# Altium PCB PCB3.PcbDoc
Units mm, origin at the board's own origin, x right, y up, seen from the top; angles counter-clockwise.
Board outline 42.93 x 12.19 mm, 2 copper layers (Top Layer, Bottom Layer); 11 components, 11 nets, 38 pads, 11 vias.
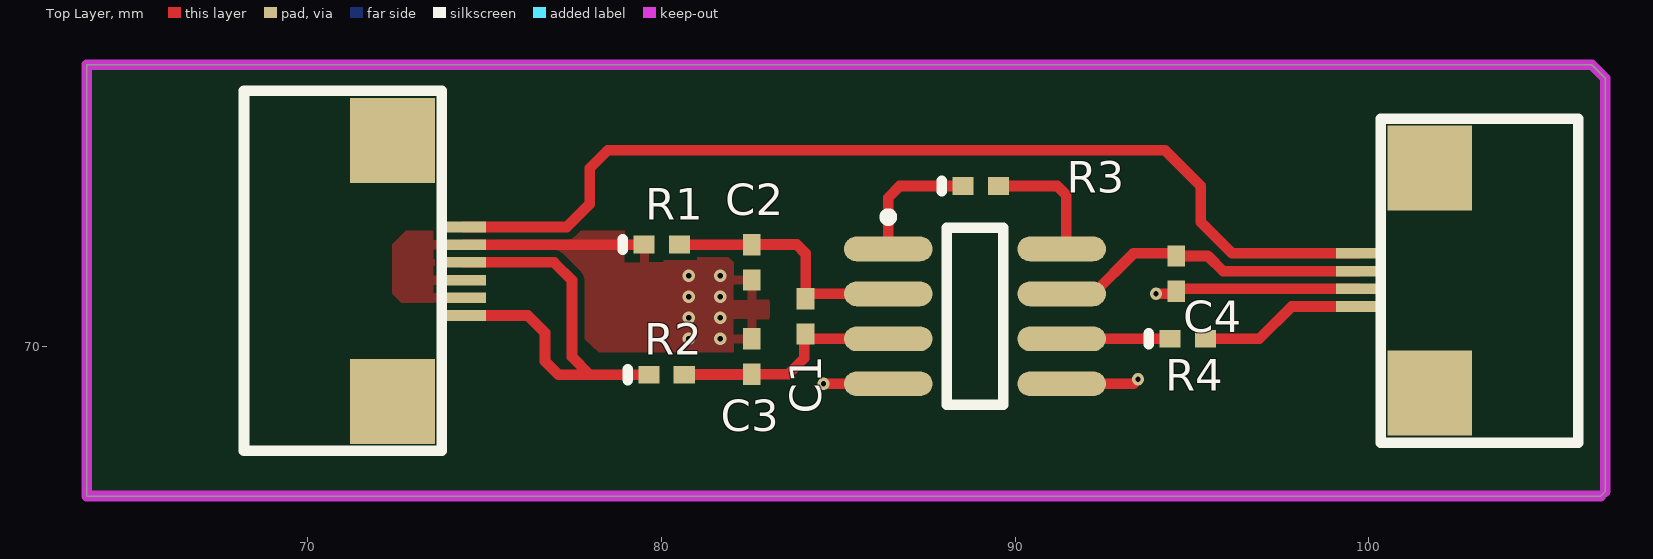
[diagram p0: Top Layer view]
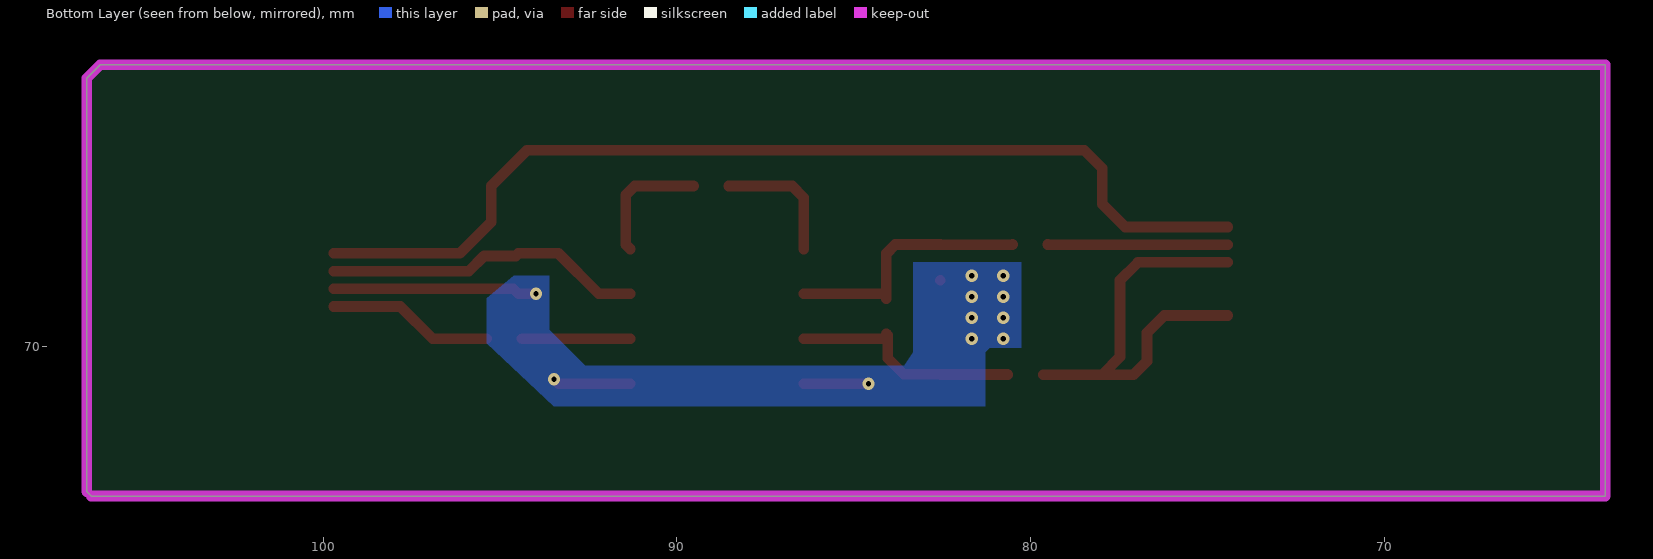
[diagram p1: Bottom Layer view, seen from below]

## Layer stack, top to bottom
Top Solder: solder mask 0.0102, Solder Resist, Dk 3.5
Top Layer: signal copper 0.0356
Dielectric 1: dielectric 0.32, FR-4, Dk 4.8
Bottom Layer: signal copper 0.0356
Bottom Solder: solder mask 0.0102, Solder Resist, Dk 3.5

## Board outline
63.754,65.786 106.553,65.786 106.68,65.913 106.68,77.597 106.299,77.978 63.754,77.978

## Design rules (kind name [scope] priority, off if disabled: settings)
Clearance Clearance_1 [InPolygon] p1: gap=0.2 ignorepadtopadclearanceinfootprint=FALSE
Clearance [All] p2: gap=0 ignorepadtopadclearanceinfootprint=FALSE
PolygonConnect [All] p1: thpad.connectstyle=Relief thpad.reliefconductorwidth=0.254 thpad.reliefentries=4 thpad.polygonreliefangle="90 Angle" thpad.airgapwidth=0.254 smdpad.connectstyle=Relief smdpad.reliefconductorwidth=0.254 smdpad.reliefentries=4 smdpad.polygonreliefangle="90 Angle" smdpad.airgapwidth=0.254 via.connectstyle=Direct via.reliefconductorwidth=0.254 via.reliefentries=4 via.polygonreliefangle="90 Angle" via.airgapwidth=0.254
RoutingVias [All] p1: holewidth=0.15 width=0.35 viastyle="Through Hole" minholewidth=0.15 minwidth=0.35 maxholewidth=0.711 maxwidth=1.27
SolderMaskExpansion [All] p1: expansion=0.102
Width [All] p1: maxlimit=0.762 minlimit=0.025 preferedwidth=0.254 minimp=50.000000 maximp=50.000000 favimp=50.000000
30 further rules are at their usual default settings.

## Classes and differential pairs
component class Sheet2: C1 C2 C3 C4 R1 R2 R3 R4

## Components (designator, comment, footprint, x,y, rotation, side; value= is the part's Value field where it differs from the comment)
C1 "1nF" 0402 84.074,70.866 r90 top
C2 "1nF" 0402 82.55,72.39 r90 top
C3 "1nF" 0402 82.55,69.731 r90 top
C4 "0.1nF" 0402 94.551,72.072 r270 top
IC1 "AD623" SO8_M 88.863,70.866 r0 top
P1 "Header 6" 软排线6p 89.154,78.117 r270 top
P2 "Header 4" 软排线4p 101.473,60.956 r90 top
R1 "1K" 0402-A 80.01,72.898 r0 top
R2 "1K" 0402-A 80.145,69.215 r0 top
R3 "10K" 0402-A 89.027,74.549 r0 top
R4 "100R" 0402-A 94.877,70.231 r0 top

## Footprints (in the part's own frame and the unit in brackets; to place one, negate y for a bottom-side part, rotate by r counter-clockwise, add the part's x,y. Pads: shape width x height; smd on the part's side, far side on the other; paste and mask are expansions set on the pad)
0402 [mm] "Chip Capacitor, Body 1.0x0.5mm, IPC High Density"
  rect 0.6x0.5 smd: 1(-0.5,0) 2(0.5,0)
  body extent -0.55,-0.3 0.55,0.3, height 1.3
0402-A [mm] "Chip Inductor, Body 1.0x0.5mm, IPC High Density"
  rect 0.6x0.5 smd: 1(-0.5,0) 2(0.5,0)
  silkscreen extent -1.1,-0.15 -1.1,0.15, body extent -0.55,-0.3 0.55,0.3, height 0.55
SO8_M [mm] "SOIC, 8-Leads, Body 4.9x3.9mm, Pitch 1.27mm, IPC Low Density"
  oval 2.5x0.7 smd: 1(-2.45,1.905) 2(-2.45,0.635) 3(-2.45,-0.635) 4(-2.45,-1.905) 5(2.45,-1.905) 6(2.45,-0.635) 7(2.45,0.635) 8(2.45,1.905)
  silkscreen extent -2.57,-2.5 0.8,2.93, body extent -2,-2.5 2,2.5, height 1.75
软排线4p [mm]
  rect 0.3x1.25 smd: 1(11.688,1.778) 2(11.188,1.778) 3(10.688,1.778) 4(10.188,1.778)
  rect 2.4x2.4 smd: ""(7.738,-0.247) ""(14.106,-0.247)
  silkscreen extent 6.34,-4.44 15.49,1.14
软排线6p [mm]
  rect 0.3x1.25 smd: 1(7.227,-14.732) 3(6.227,-14.732) 4(5.727,-14.732) 5(5.227,-14.732) 5(6.727,-14.732) 6(4.727,-14.732)
  rect 2.4x2.4 smd: ""(2.277,-16.757) ""(9.661,-16.757)
  silkscreen extent 0.88,-20.95 11.05,-15.37

## Part data
C1 C2 C3 C4: library part CAP, "电容"
IC1: "IC"
P1: "Header, 6-Pin", LatestRevisionDate=17-Jul-2002, LatestRevisionNote="Re-released for DXP Platform.", Publisher="Altium Limited"
P2: "Header, 4-Pin", LatestRevisionDate=17-Jul-2002, LatestRevisionNote="Re-released for DXP Platform.", Publisher="Altium Limited"
R1 R2 R3 R4: library part RES, "电阻"

## Via types
v1: diameter 0.35, hole 0.15, Top Layer to Bottom Layer, tented both sides, 11 vias

## Nets (pads, with @x,y where several pads share a name; then routed paths per layer and width w, separated by ;. In a path a pad name is that pad's centre, name@x,y a point inside that pad or via, vN(x,y) a via of type N, cw(c..) or ccw(c..) an arc to the next point about the centre after c; other vN are vias at no path point)
NetC1_1: C1.1 C3.1 IC1.3 R2.2 | length 6.5
  Top Layer w0.3: R2.2 80.653,69.223 82.542,69.223 C3.1 83.582,69.231 84.036,69.685 84.036,70.328 C1.1 ; C1.1@84.197,70.231 IC1.3
NetC1_2: C1.2 C2.2 IC1.2 R1.2 | length 7.2
  Top Layer w0.3: R1.2 80.514,72.894 82.546,72.894 C2.2 82.558,72.898 83.82,72.898 84.074,72.644 C1.2 ; C1.2@84.197,71.501 IC1.2
NetC2_1: C2.1 C3.2 C4.2 IC1.4 IC1.5 P1.3 P1.5 P2.3 R1.1 | length 14.9
  Top Layer w0.3: P1.5@74.422,72.89 79.502,72.89 R1.1 ; v1(84.582,68.961) IC1.4 ; IC1.5 93.345,68.961 v1(93.472,69.088) ; v1(93.98,71.501) 94.48,71.501 C4.2 94.623,71.644 P2.3
  other v1: 80.772,70.231 81.661,70.231 80.772,70.824 81.661,70.824 80.772,71.416 81.661,71.416 80.772,72.009 81.661,72.009
NetC4_1: C4.1 IC1.7 P2.2 | length 9.1
  Top Layer w0.3: IC1.7 92.202,71.501 93.345,72.644 94.48,72.644 C4.1 95.449,72.572 95.877,72.144 P2.2
NetIC1_1: IC1.1 R3.1 | length 3.7
  Top Layer w0.3: IC1.1 86.413,74.221 86.741,74.549 R3.1
NetIC1_6: IC1.6 R4.1 | length 3.1
  Top Layer w0.3: IC1.6 R4.1
NetIC1_8: IC1.8 R3.2 | length 3.6
  Top Layer w0.3: R3.2 91.186,74.549 91.44,74.295 91.44,72.898 IC1.8
NetP1_1: P1.1 P1.4 R2.1 | length 12.5
  Top Layer w0.3: P1.1 76.219,70.89 76.708,70.401 76.708,69.596 77.089,69.215 77.978,69.215 ; P1.4 76.962,72.39 76.983,72.369 77.47,71.882 77.47,69.723 77.978,69.215 ; R2.1 77.978,69.215
NetP1_6: P1.6 P2.1 | length 28.6
  Top Layer w0.3: P1.6 77.327,73.39 77.978,74.041 77.978,75.057 78.486,75.565 94.234,75.565 95.25,74.549 95.25,73.533 96.139,72.644 P2.1
NetP2_4: P2.4 R4.2 | length 4.7
  Top Layer w0.3: R4.2 96.901,70.231 97.814,71.144 P2.4
V-: 
pads on no net: P1. P2.

## Polygon pours and split planes (outlines as drawn)
NetC2_1 on Top Layer (solid, remove dead copper, pour order 0): 72.39,72.898 72.771,73.279 79.756,73.279 80.01,73.025 80.01,72.644 81.788,72.644 82.042,72.39 83.058,72.39 83.058,69.723 82.931,69.85 78.232,69.85 76.708,71.247 76.581,71.247 72.644,71.247 72.39,71.501
NetC2_1 on Bottom Layer (solid, remove dead copper, pour order 4): 80.264,72.39 80.264,72.136 80.264,69.977 81.153,69.977 81.28,69.85 81.28,68.326 93.345,68.326 93.472,68.326 95.377,70.104 95.377,71.374 94.615,72.009 94.488,72.009 93.599,72.009 93.599,70.485 92.583,69.469 83.566,69.469 83.312,69.85 83.312,69.977 83.312,72.39

## Keep-outs
Keep-Out Layer:
  lines w0.3: 106.553,65.786 73.754,65.786 63.754,65.786 63.754,77.978 73.754,77.978 106.299,77.978 106.68,77.597 106.68,65.913